# Altium PCB Slave_PCB1.PcbDoc
Units mil, origin at the board's own origin, x right, y up, seen from the top; angles counter-clockwise.
Board outline 2216 x 1413 mil, 2 copper layers (Top Layer, Bottom Layer); 21 components, 11 nets, 48 pads, 0 vias.
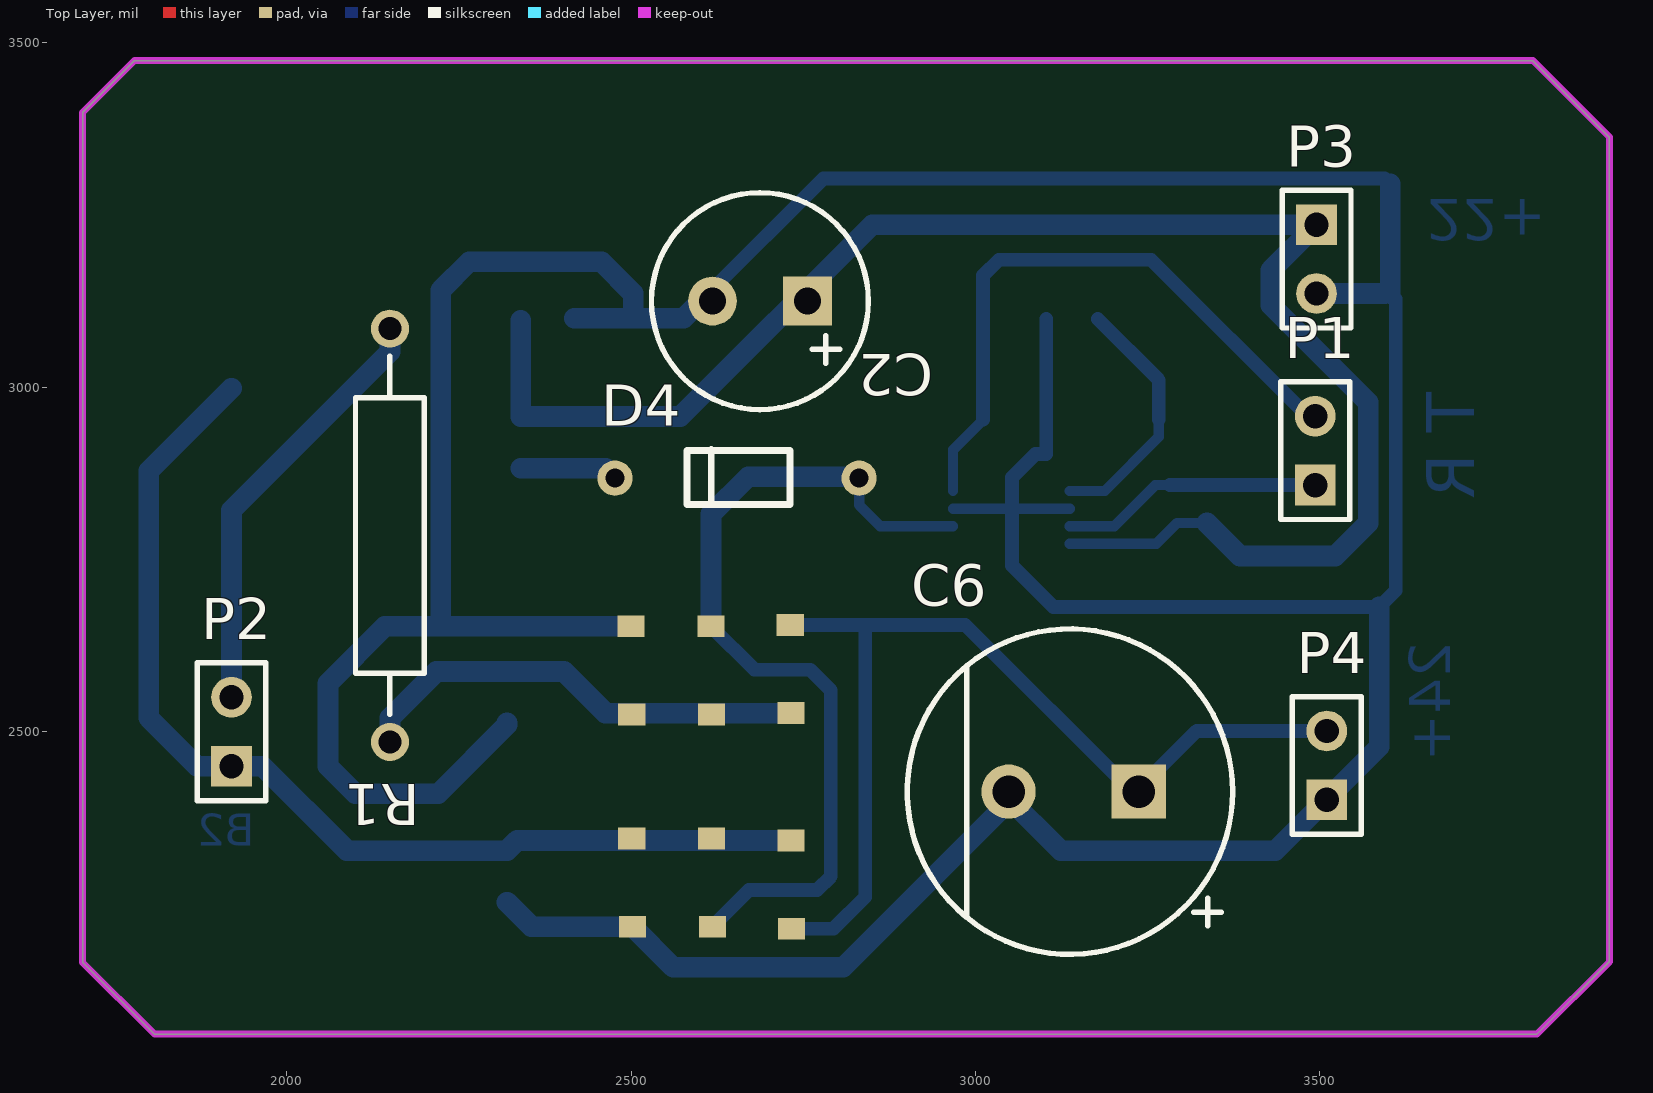
[diagram p0: Top Layer view]
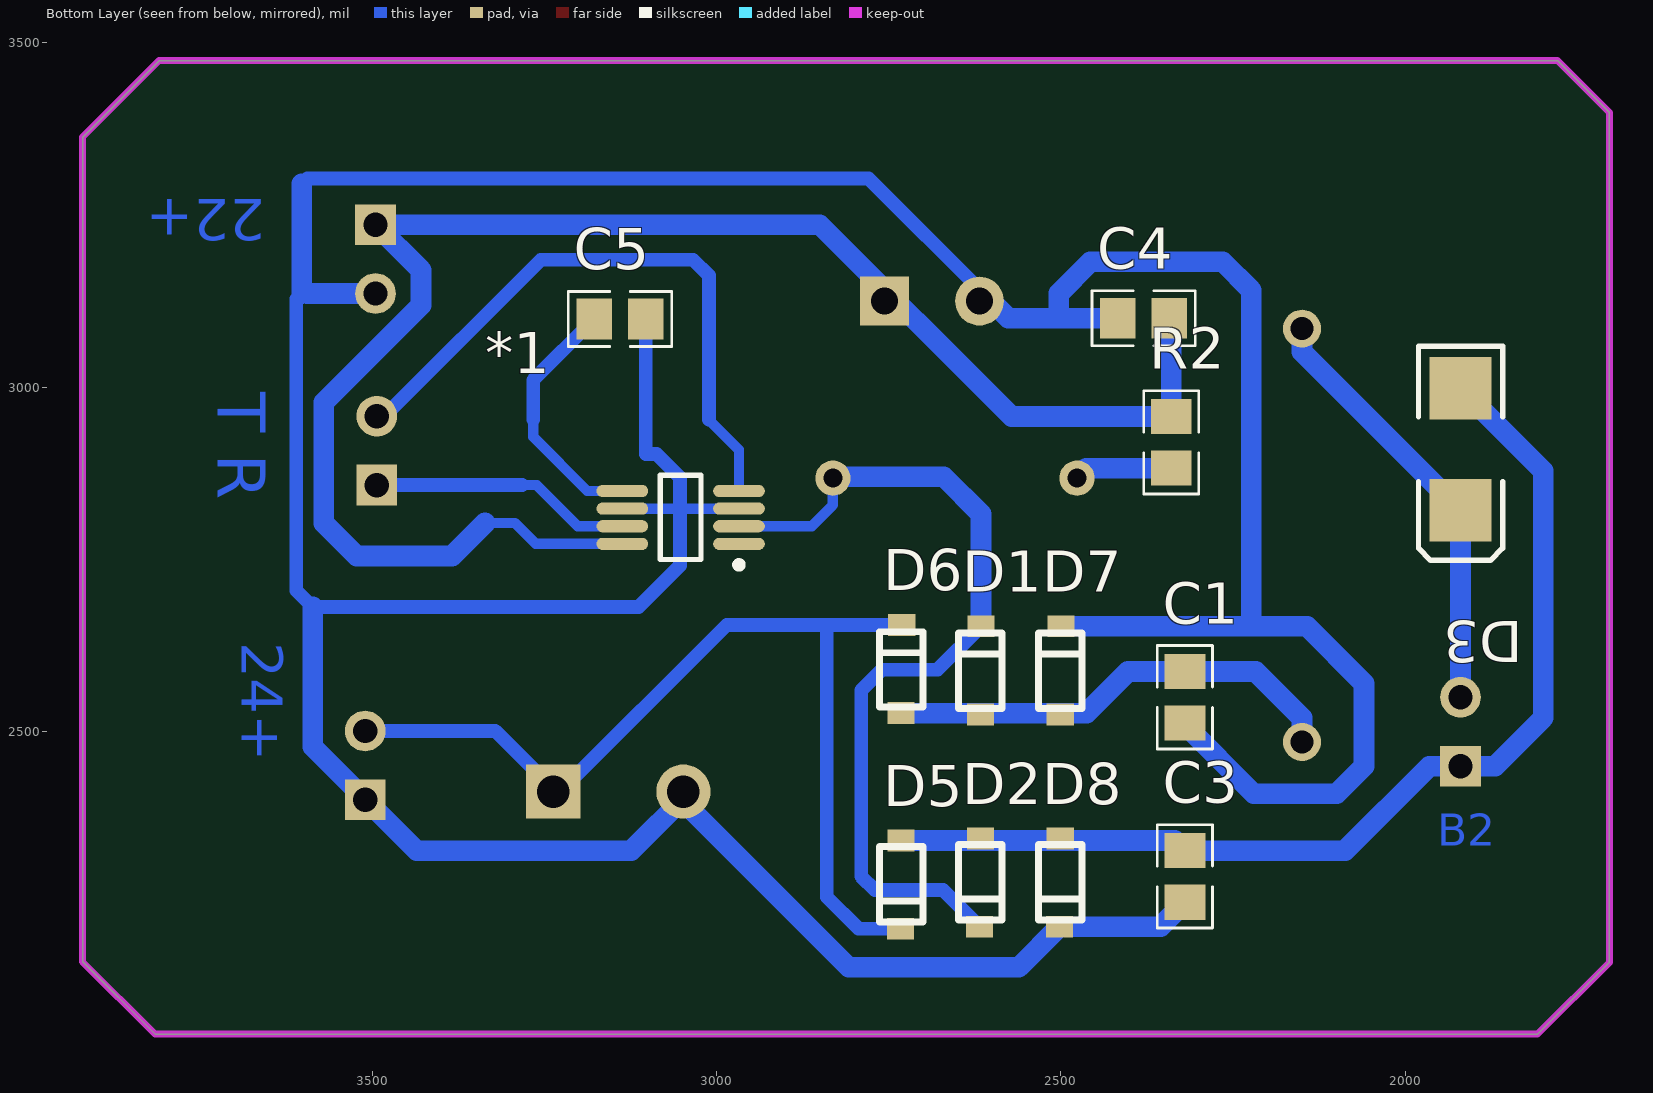
[diagram p1: Bottom Layer view, seen from below]

## Layer stack, top to bottom
Top Solder: solder mask 0.4, Solder Resist, Dk 3.5
Top Layer: signal copper 1.4
Dielectric 1: dielectric 12.6, FR-4, Dk 4.8
Bottom Layer: signal copper 1.4
Bottom Solder: solder mask 0.4, Solder Resist, Dk 3.5

## Board outline
1704,2165 1704,3399 1779,3474 3809,3474 3920,3363 3920,2166 3815,2061 1808,2061

## Design rules (kind name [scope] priority, off if disabled: settings)
Clearance [All] p1: gap=7
PolygonConnect [All] p1: connectstyle=Relief reliefconductorwidth=10 reliefentries=4 polygonreliefangle="90 Angle" airgapwidth=10
RoutingVias [All] p1: holewidth=28 width=50 viastyle="Through Hole" minholewidth=28 minwidth=50 maxholewidth=28 maxwidth=50
SolderMaskExpansion [All] p1: expansion=4
Width [All] p1: maxlimit=100 minlimit=10 preferedwidth=20
30 further rules are at their usual default settings.

## Components (designator, comment, footprint, x,y, rotation, side; value= is the part's Value field where it differs from the comment)
*1 "CMT001" MSOP-MS8_M 3052,2811 r0 bottom
C1 "Cap" 0805-1 2320,2550 r270 bottom
C2 "Cap Pol1" C-RB-8 2756,3125 r180 top
C3 "Cap" 0805-1 2320,2290 r90 bottom
C4 "Cap" 0805-1 2380,3100 r180 bottom
C5 "Cap" 0805-1 3140,3099 r0 bottom
C6 "Cap Pol1" C-RB-12 3237,2413 r180 top
D1 "BAT46W" SOD-123 2617,2525 r90 bottom
D2 "BAT46W" SOD-123 2617,2345 r270 bottom
D3 "1.0SMB33CA 双向TVS" DIODE-SMB 1920,2910 r270 bottom
D4 "1N4148W" DO35 2831,2868 r180 top
D5 "BAT46W" SOD-123 2732,2342 r270 bottom
D6 "BAT46W" SOD-123 2732,2527 r90 bottom
D7 "BAT46W" SOD-123 2501,2525 r90 bottom
D8 "BAT46W" SOD-123 2501,2345 r270 bottom
P1 "Header 2" HDR1X2 3493,2858 r90 top
P2 "Bus" HDR1X2 1920,2450 r90 top
P3 "Header 2" HDR1X2 3495,3236 r270 top
P4 "Load" HDR1X2 3510,2401 r90 top
R1 "Res Adj2" AXIAL-0.6 2150,2785 r270 top
R2 "Res2" 0805-1 2340,2920 r90 bottom

## Footprints (in the part's own frame and the unit in brackets; to place one, negate y for a bottom-side part, rotate by r counter-clockwise, add the part's x,y. Pads: shape width x height; smd on the part's side, far side on the other; paste and mask are expansions set on the pad)
0805-1 [mm] "贴片带丝印"
  rect 1.3x1.5 smd: 1(-0.95,0) 2(0.95,0)
  silkscreen extent -1.91,-1.02 1.91,1.02, body extent -1.14,-0.51 1.14,0.51, height 1
AXIAL-0.6 [mm] "Axial Device, Thru-Hole; 2 Leads; 0.6 in Pin Spacing"
  round 1.4 hole 0.85: 1(-7.62,0) 2(7.62,0)
  silkscreen extent -6.6,-1.27 6.6,1.27
C-RB-8 [mm] "35V 220UF电容"
  rect 1.8x1.8 hole 1: 1(0,0)
  round 1.8 hole 1: 2(3.5,0)
  silkscreen extent -2.25,-4 5.75,4
C-RB-12 [mm] "35V470uF电容"
  rect 2x2 hole 1.2: 1(0,0)
  round 2 hole 1.2: 2(4.8,0)
  silkscreen extent -3.46,-6 8.54,6
DIODE-SMB [mm] "DO-214-AA/SMB; 2 C-Bend Leads; Body 5.3 x 3.6 mm, inc. leads (LxW)"
  rect 2.3x2.3 smd: 1(-2.25,0) 2(2.25,0)
  silkscreen extent -3.8,-1.55 4.1,1.55
DO35 [mm]
  round 1.3 hole 0.7: 1(0,0) 2(9,0)
  silkscreen extent 2.55,-1.05 6.35,0.97
HDR1X2 [mm] "Connector; Header; 2 Position"
  rect 1.5x1.5 hole 0.9: 1(0,0)
  round 1.5 hole 0.9: 2(2.54,0)
  silkscreen extent -1.27,-1.27 3.81,1.27
MSOP-MS8_M [mm] "TSOP, 8-Leads, Body 3x3mm, Pitch 0.65mm, IPC Low Density"
  oval 1.905x0.45 smd: 1(-2.15,0.975) 2(-2.15,0.325) 3(-2.15,-0.325) 4(-2.15,-0.975) 5(2.15,-0.975) 6(2.15,-0.325) 7(2.15,0.325) 8(2.15,0.975)
  silkscreen extent -2.27,-1.55 0.75,1.87, body extent -1.6,-1.6 1.6,1.6, height 1.1
SOD-123 [mm]
  rect 0.8x1 all layers, no hole: 1(0,0) 2(3.25,-0.025)
  silkscreen extent 0.22,-0.8 3,0.8

## Part data
*1: "从机"
C1 C3 C4 C5: "Capacitor"
C2 C6: "Polarized Capacitor (Radial)"
D1 D2 D4 D5 D6 D7 D8: library part Diode, "Default Diode"
D3: library part "D Zener", "Zener Diode"
P1 P3: "Header, 2-Pin"
P2 P4: library part "Header 2", "Header, 2-Pin"
R1: "Variable Resistor"
R2: "Resistor"

## Nets (pads, with @x,y where several pads share a name; then routed paths per layer and width w, separated by ;. In a path a pad name is that pad's centre, name@x,y a point inside that pad or via, vN(x,y) a via of type N, cw(c..) or ccw(c..) an arc to the next point about the centre after c; other vN are vias at no path point)
22V: *1.8 C2.1 C4.2 P3.1 R2.2 | length 2414.8
  Bottom Layer w15: *1.8 3262.61,2772.61 3293,2803 3336,2803
  Bottom Layer w30: C4.2@2340,3097.4 R2.2 2571.4,2957.4 2850,3236 P3.1 3429,3170 3429,3119 3570,2978 3570,2803 3522,2755 3384,2755 3336,2803
24V: C6.1 D5.2 D6.2 P4.2 | length 1438.1
  Bottom Layer w20: D6.2 2840,2654.95 ; D5.2 2794.05,2214.05 2840,2260 2840,2654.95 ; P4.2@3509,2501 3321,2501 3230,2410 2985.05,2654.95 2840,2654.95
BUS1: D3.2 P2.2 R1.1 | length 630.3
  Bottom Layer w30: P2.2 D3.2 2150,3051.42 R1.1
BUS2: C3.2 D2.1 D3.1 D5.1 D8.1 P2.1 | length 1546.1
  Bottom Layer w30: D3.1 1800,2878.58 1800,2520 1870,2450 P2.1 1965,2450 2087.6,2327.4 C3.2 2334.6,2342 D5.1
GND: *1.3 *1.6 C1.2 C2.2 C3.1 C4.1 C5.1 C6.2 D7.2 D8.2 P3.2 P4.1 | length 6576.9
  Bottom Layer w15: *1.3 3053,2823.8 *1.6
  Bottom Layer w20: C2.2@2609.2,3133 2779.2,3303 3594,3303 3602,3295 ; C5.1 3102.6,2903 3087,2903 3053,2869 3053,2823.8 3053,2741 3113,2681 3586,2681 3610,2705 3610,3128
  Bottom Layer w30: C3.1 2355.55,2217.05 D8.2 2561.03,2158 2808,2158 3041.02,2391.02 3041.02,2410 3124.02,2327 3435,2327 3586,2478 3586,2681 ; C1.2 2320,2510 2220,2410 2100,2410 2060,2450 2060,2570 2142.95,2652.95 2224,2652.95 ; C4.1 2503,3100 ; D7.2 2224,2652.95 ; C2.2@2609.2,3133 2576.2,3100 2503,3100 ; P3.2 3594.5,3136 ; 3602,3136 3602,3295 ; 2224,2652.95 2224,3141 2265,3182 2457,3182 2503,3136 2503,3100
Net*1_2: *1.2 D1.2 D2.2 D4.1 | length 1272.2
  Bottom Layer w15: D4.1 2831,2829 2861.8,2798.2 *1.2
  Bottom Layer w20: D1.2 2678.97,2590 2760,2590 2790,2560 2790,2290 2770,2270 2670.94,2270 D2.2
  Bottom Layer w30: D1.2 2616.02,2816.02 2670,2870 D4.1@2830,2870
Net*1_5: *1.5 C5.2 | length 369.7
  Bottom Layer w15: *1.5 3187.39,2849.39 3266.12,2928.12 3266.12,2953
  Bottom Layer w20: C5.2 3266.12,3010.28 3266.12,2953
NetC1_1: C1.1 D1.1 D6.1 D7.1 R1.2 | length 669.9
  Bottom Layer w30: R1.2 2150,2520 2217.4,2587.4 C1.1 2402.6,2587.4 2463,2527 D6.1
NetD4_2: D4.2 R2.1 | length 140.9
  Bottom Layer w30: R2.1 2463.07,2882.6 D4.2@2475.67,2870
RXD: *1.7 P1.1 | length 381.1
  Bottom Layer w15: *1.7 3201.2,2798.2 3261,2858 3282,2858
  Bottom Layer w20: 3282,2858 P1.1
TXD: *1.4 P1.2 | length 916.2
  Bottom Layer w15: *1.4 2967.35,2909.35 3011,2953
  Bottom Layer w20: 3011,2953 3011,3162 3034,3185 3255,3185 3482,2958 P1.2
pads on no net: *1.1

## Keep-outs
Keep-Out Layer:
  the board outline again, w10

## Other copper
Bottom Layer:
  text "22+" at 3655,3273 h60 r180
  text "T R" at 3724,2993 h70 r90
  text "24+" at 3689,2630 h60 r90
  text "B2" at 1954,2319 h80